# Altium PCB PCB_PID LINE FOLLOWER_2_2023-06-07.pcbdoc
Units mil, origin at the board's own origin, x right, y up, seen from the top; angles counter-clockwise.
Board outline 4910 x 2903.11 mil, 2 copper layers (Top Layer, Bottom Layer); 14 components, 41 nets, 75 pads, 4 vias.
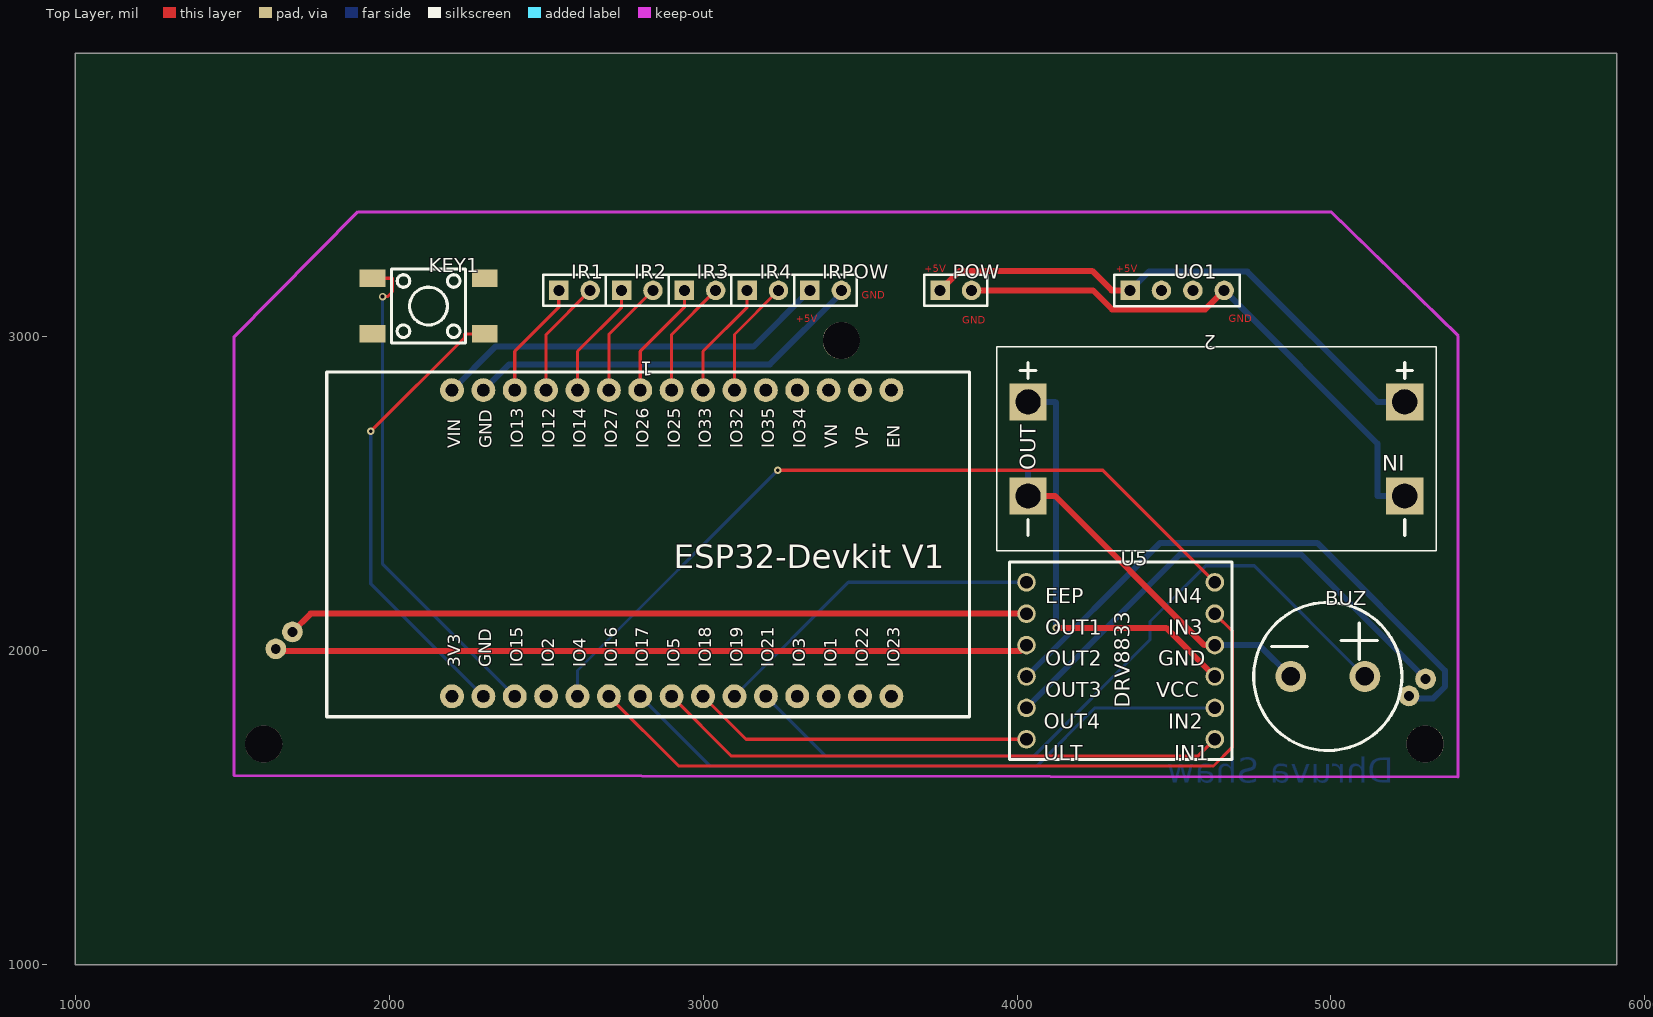
[diagram p0: Top Layer view]
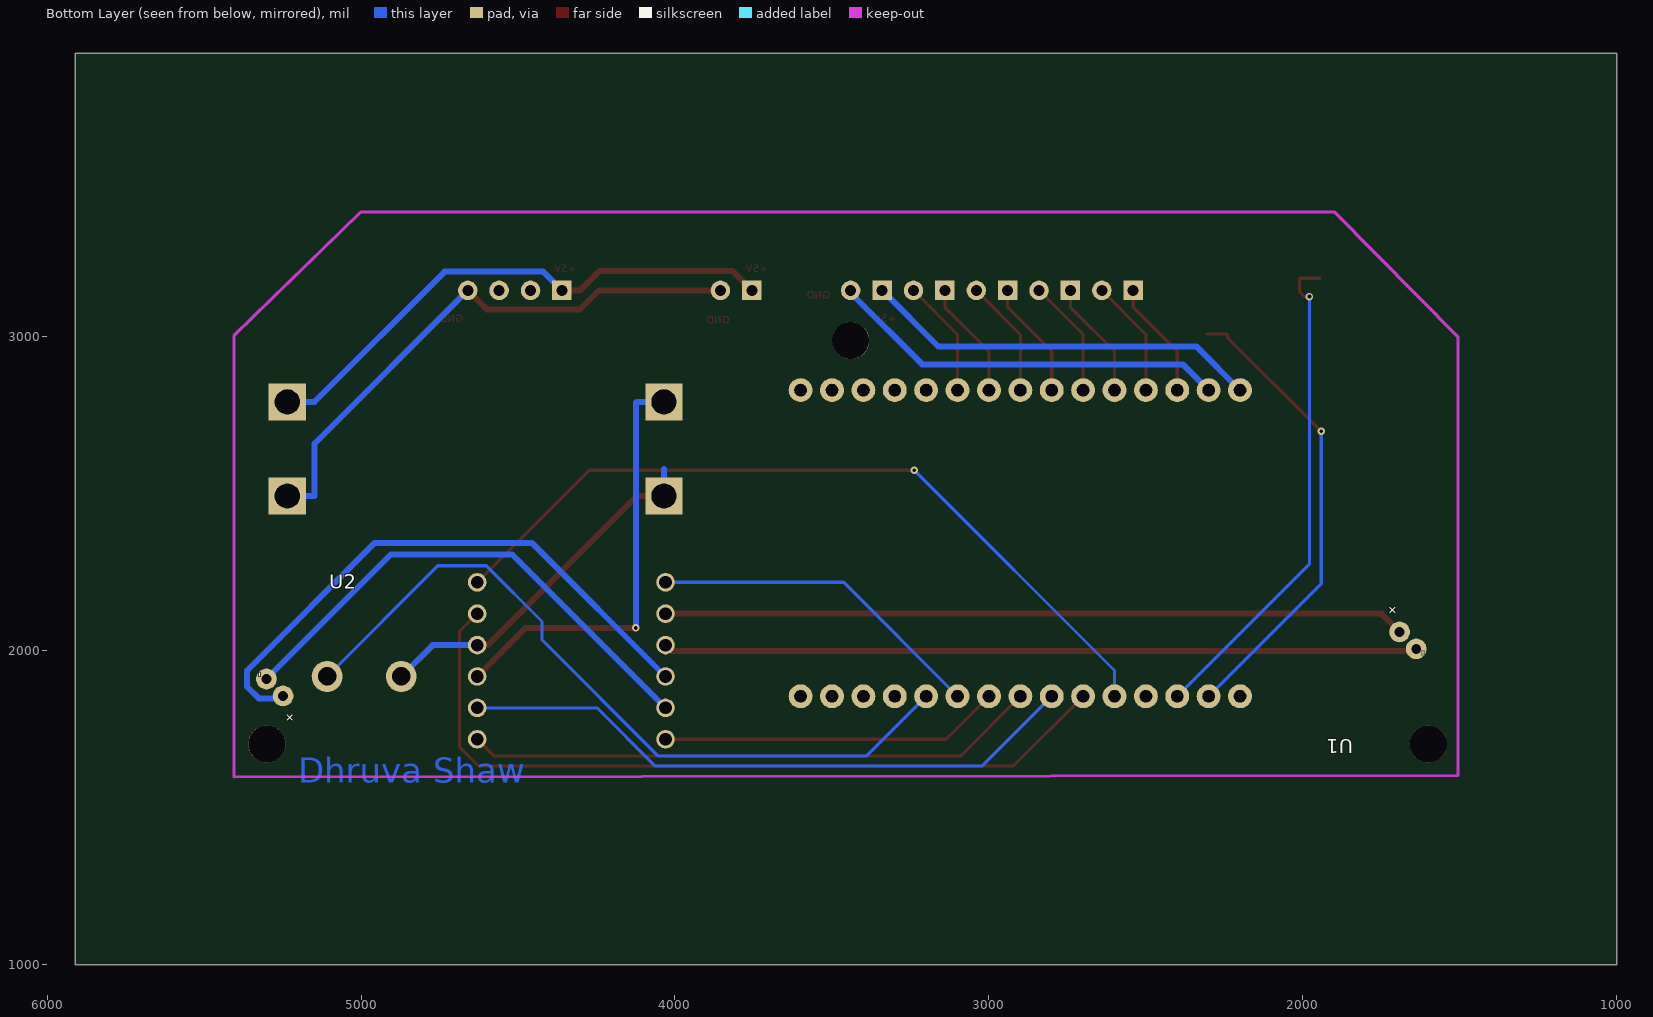
[diagram p1: Bottom Layer view, seen from below]

## Layer stack, top to bottom
Top Layer: signal copper (thickness not stored)
Dielectric: dielectric 12.6, FR-4, Dk 4.8
Bottom Layer: signal copper (thickness not stored)

## Board outline
5910,1000 1000,1000 1000,3903.11 5910,3903.11

## Components (designator, comment, footprint, x,y, rotation, side; value= is the part's Value field where it differs from the comment)
1 "ESP32DEVKITV1" ESP32-DEVKITV1 3100,2388.11 r0 top
2 "DC-DC-STEP-UP-MT3608" DC-DC-STEP-UP-MT3608 4635,2643.11 r0 top
BUZ "BUZZER" BUZ-TH_BD12.0-P6.00-D0.9-RD 4990,1918.11 r0 top
IR1 "IR SENSOR ARRAY" HDR-F-2.54_1X2 2590,3148.11 r0 top
IR2 "IR SENSOR ARRAY" HDR-F-2.54_1X2 2790,3148.11 r0 top
IR3 "HDR-F-2.54_1x2" HDR-F-2.54_1X2 2990,3148.11 r0 top
IR4 "IR SENSOR ARRAY" HDR-F-2.54_1X2 3190,3148.11 r0 top
IRPOW "IR SENSOR ARRAY POWER" HDR-F-2.54_1X2 3390,3148.11 r0 top
KEY1 "4PINTACTPCBTHTPUSHBUTTON" SW-SMD_4P-L6.0-W6.0-P4.50-LS10.0_TL3301EF160QG 2125,3098.11 r0 top
POW "POWER" HDR-F-2.54_1X2 3805,3148.11 r0 top
U1 "MOTOR" VIBE-MOTOR-10MM 1665,2033.11 r180 bottom
U2 "MOTOR" VIBE-MOTOR-10MM 5275,1883.11 r0 bottom
U5 "DRV8833 (NO ORIGINAL)" "DRV8833 (NO ORIGINAL)" 4330,1968.11 r0 top
UO1 "USB OUT" HDR-F-2.54_1X4 4510,3148.11 r0 top

## Footprints (in the part's own frame and the unit in brackets; to place one, negate y for a bottom-side part, rotate by r counter-clockwise, add the part's x,y. Pads: shape width x height; smd on the part's side, far side on the other; paste and mask are expansions set on the pad)
BUZ-TH_BD12.0-P6.00-D0.9-RD [mm]
  round 2.5 hole 1.5: 1(-3,0) 2(3,0)
  silkscreen extent -5.99,-5.99 5.99,5.99
DC-DC-STEP-UP-MT3608 [mm]
  rect 3x3 hole 2 slot 2.005 at 0 deg: IN+(15.24,3.81) IN-(15.24,-3.81) OUT+(-15.24,3.81) OUT-(-15.24,-3.81)
  silkscreen extent -17.78,-8.25 17.78,8.25
"DRV8833 (NO ORIGINAL)" [mm]
  round 1.5 hole 1.02: 1(-7.62,6.35) 2(-7.62,3.81) 3(-7.62,1.27) 4(-7.62,-1.27) 5(-7.62,-3.81) 6(-7.62,-6.35) 7(7.62,6.35) 8(7.62,3.81) 9(7.62,1.27) 10(7.62,-1.27) 11(7.62,-3.81) 12(7.62,-6.35)
  silkscreen extent -9,-8 9,8
ESP32-DEVKITV1 [mil]
  round 76 hole 39.36: 1(-900.39,-533.07) 2(-800.39,-533.07) 3(-700.39,-533.07) 4(-600.39,-533.07) 5(-500.39,-533.07) 6(-400.39,-533.07) 7(-300.39,-533.07) 8(-200.39,-533.07) 9(-100.39,-533.07) 10(-0.39,-533.07) 11(99.61,-533.07) 12(199.61,-533.07) 13(299.61,-533.07) 14(399.61,-533.07) 15(499.61,-533.07) 16(499.61,442.13) 17(399.61,442.13) 18(299.61,442.13) 19(199.61,442.13) 20(99.61,442.13) 21(-0.39,442.13) 22(-100.39,442.13) 23(-200.39,442.13) 24(-300.39,442.13) 25(-400.39,442.13) 26(-500.39,442.13) 27(-600.39,442.13) 28(-700.39,442.13) 29(-800.39,442.13) 30(-900.39,442.13)
  silkscreen extent -1299,-598 748,500
HDR-F-2.54_1X2 [mil]
  rect 62x62 hole 35: 1(-50,0)
  round 62 hole 35: 2(50,0)
  silkscreen extent -100,-49 100,50
HDR-F-2.54_1X4 [mil]
  rect 62x62 hole 35: 1(-150,0)
  round 62 hole 35: 2(-50,0) 3(50,0) 4(150,0)
  silkscreen extent -200,-50 200,50
SW-SMD_4P-L6.0-W6.0-P4.50-LS10.0_TL3301EF160QG [mm]
  rect 2.1x1.4 smd: 1(-4.55,2.25) 2(4.55,2.25) 3(-4.55,-2.25) 4(4.55,-2.25)
  silkscreen extent -3,-3 3,3
VIBE-MOTOR-10MM [mil]
  round 66 hole 31.4: +(-26.5,27) -(26.5,-27)

## Free pads (board coordinates)
  round 118.11 hole 118.11 unplated: ""(1600,1703.11) ""(3440,2988.11) ""(5300,1703.11)

## Via types
v1: diameter 24.02, hole 12.01, Top Layer to Bottom Layer, tented both sides, 4 vias

## Nets (pads, with @x,y where several pads share a name; then routed paths per layer and width w, separated by ;. In a path a pad name is that pad's centre, name@x,y a point inside that pad or via, vN(x,y) a via of type N, cw(c..) or ccw(c..) an arc to the next point about the centre after c; other vN are vias at no path point)
1_1: 1.1
1_2: 1.2 KEY1.4 | length 1491
  Top Layer w10: v1(1941.15,2699.12) 2239.83,2997.8 2239.83,3009.53 KEY1.4
  Bottom Layer w10: v1(1941.15,2699.12) 1941.15,2213.5 1.2
1_3: 1.3 KEY1.1 | length 1592.6
  Top Layer w10: KEY1.1 2010.18,3186.69 2010.18,3144.07 1994.44,3128.33 v1(1978.69,3128.33)
  Bottom Layer w10: v1(1978.69,3128.33) 1978.69,2275.96 1.3
1_4: 1.4
1_5: 1.5 U5.7 | length 2524.7
  Top Layer w10: v1(3237.66,2575.19) 4272.92,2575.19 U5.7
  Bottom Layer w10: 1.5 2599.61,1937.14 v1(3237.66,2575.19)
1_6: 1.6 U5.8 | length 2552.1
  Top Layer w10: 1.6 2921.62,1633.03 4625.78,1633.03 4686.85,1694.1 4686.85,2061.26 U5.8
1_7: 1.7 U5.11 | length 1999.5
  Bottom Layer w10: 1.7 3022.24,1632.41 4062.54,1632.41 4248.24,1818.11 U5.11
1_8: 1.8 U5.12 | length 1831.7
  Top Layer w10: 1.8 3090.38,1664.27 4576.16,1664.27 U5.12
1_9: 1.9 U5.6 | length 1087.1
  Top Layer w10: 1.9 3136.54,1718.11 U5.6
1_10: 1.10 U5.1 | length 1080.8
  Bottom Layer w10: 1.10 3462.68,2218.11 U5.1
1_11: 1.11 BUZ.2 | length 2418.2
  Bottom Layer w10: 1.11 3389.4,1665.25 4054.24,1665.25 4423.51,2034.52 4423.51,2093.05 4601.17,2270.71 4755.51,2270.71 BUZ.2
1_12: 1.12
1_13: 1.13
1_14: 1.14
1_15: 1.15
1_16: 1.16
1_17: 1.17
1_18: 1.18
1_19: 1.19
1_20: 1.20
1_21: 1.21 IR4.2 | length 376
  Top Layer w10: 1.21 3099.61,3007.72 IR4.2
1_22: 1.22 IR4.1 | length 376
  Top Layer w10: 1.22 2999.61,2953.75 3140,3094.14 IR4.1
1_23: 1.23 IR3.2 | length 376
  Top Layer w10: 1.23 2899.61,3007.72 IR3.2
1_24: 1.24 IR3.1 | length 376
  Top Layer w10: 1.24 2799.61,2953.75 2940,3094.14 IR3.1
1_25: 1.25 IR2.2 | length 376
  Top Layer w10: 1.25 2699.61,3007.72 IR2.2
1_26: 1.26 IR2.1 | length 376
  Top Layer w10: 1.26 2599.61,2953.75 2740,3094.14 IR2.1
1_27: 1.27 IR1.2 | length 376
  Top Layer w10: 1.27 2499.61,3007.72 IR1.2
1_28: 1.28 IR1.1 | length 376
  Top Layer w10: 1.28 2399.61,2953.75 2540,3094.14 IR1.1
1_30: 1.30 IRPOW.1 | length 1272.1
  Bottom Layer w19.05: 1.30 2337.96,2968.59 3160.48,2968.59 IRPOW.1
GND: 1.29 2.OUT- BUZ.1 IRPOW.2 U5.9 | length 2438.5
  Top Layer w19.05: 2.OUT- 4121.56,2493.11 4596.56,2018.11 U5.9
  Bottom Layer w19.05: 1.29 2381.62,2912.25 3212.4,2912.25 3440,3139.85 IRPOW.2 ; 2.OUT- 4035,2579.67 ; U5.9 4771.89,2018.11 BUZ.1
KEY1_2: KEY1.2
KEY1_3: KEY1.3
POW_1: 2.IN+ POW.1 UO1.1 | length 1728.1
  Top Layer w19.05: POW.1 3817.31,3210.42 4239.19,3210.42 4301.5,3148.11 UO1.1
  Bottom Layer w19.05: UO1.1 4419.7,3207.81 4733.75,3207.81 5148.45,2793.11 2.IN+
POW_2: 2.IN- POW.2 UO1.4 | length 1799
  Top Layer w19.05: POW.2 4241.83,3148.11 4302.31,3087.63 4599.52,3087.63 UO1.4
  Bottom Layer w19.05: UO1.4 5148.45,2659.66 5148.45,2493.11 2.IN-
U1_+: U1.+ U5.2 | length 2362.5
  Top Layer w19.05: U1.+ 1749.5,2118.11 U5.2
U1_-: U1.- U5.3 | length 2402.1
  Top Layer w19.05: U1.- 1645.27,1999.34 4011.23,1999.34 U5.3
U2_+: U2.+ U5.4 | length 1863
  Bottom Layer w19.05: U5.4 4455.87,2343.98 4955.74,2343.98 5363.32,1936.4 5363.32,1885.62 5325.86,1848.16 5256.45,1848.16 U2.+
U2_-: U2.- U5.5 | length 1638.1
  Bottom Layer w19.05: U5.5 4518.53,2306.64 4904.97,2306.64 U2.-
U5_10: 2.OUT+ U5.10 | length 1377.6
  Top Layer w19.05: v1(4124.49,2072.9) 4475.21,2072.9 U5.10
  Bottom Layer w19.05: 2.OUT+ 4121.56,2793.11 4124.49,2790.18 v1(4124.49,2072.9)
UO1_2: UO1.2
UO1_3: UO1.3

## Other copper
Top Layer:
  text "+5V" at 3705,3206.3 h23.62
  text "+5V" at 4315,3206.3 h23.62
  text "GND" at 3505,3121.3 h23.62
  text "+5V" at 3295,3046.3 h23.62
  text "GND" at 4675,3046.3 h23.62
  text "GND" at 3825,3041.3 h23.62
Bottom Layer:
  text "Dhruva Shaw" at 5200,1578.74 h78.74

## Text inside footprints (layer, text, board x,y; h text height)
1: Top Overlay "3V3" at 2225.59,1947.17 h40 r90; Top Overlay "GND" at 2325.59,1947.17 h40 r90; Top Overlay "IO15" at 2425.59,1947.17 h40 r90; Top Overlay "IO2" at 2525.59,1947.17 h40 r90; Top Overlay "IO4" at 2625.59,1947.17 h40 r90; Top Overlay "IO16" at 2725.59,1947.17 h40 r90; Top Overlay "IO17" at 2825.59,1947.17 h40 r90; Top Overlay "IO5" at 2925.59,1947.17 h40 r90; Top Overlay "IO18" at 3025.59,1947.17 h40 r90; Top Overlay "IO19" at 3125.59,1947.17 h40 r90; Top Overlay "IO21" at 3225.59,1947.17 h40 r90; Top Overlay "IO3" at 3325.59,1947.17 h40 r90; Top Overlay "IO1" at 3425.59,1947.17 h40 r90; Top Overlay "IO22" at 3525.59,1947.17 h40 r90; Top Overlay "IO23" at 3625.59,1947.17 h40 r90; Top Overlay "VIN" at 2226.38,2644.8 h40 r90; Top Overlay "GND" at 2326.38,2644.8 h40 r90; Top Overlay "IO13" at 2426.38,2644.8 h40 r90; Top Overlay "IO12" at 2526.38,2644.8 h40 r90; Top Overlay "IO14" at 2626.38,2644.8 h40 r90; Top Overlay "IO27" at 2726.38,2644.8 h40 r90; Top Overlay "IO26" at 2826.38,2644.8 h40 r90; Top Overlay "IO25" at 2926.38,2644.8 h40 r90; Top Overlay "IO33" at 3026.38,2644.8 h40 r90; Top Overlay "IO32" at 3126.38,2644.8 h40 r90; Top Overlay "IO35" at 3226.38,2644.8 h40 r90; Top Overlay "IO34" at 3326.38,2644.8 h40 r90; Top Overlay "VN" at 3426.38,2644.8 h40 r90; Top Overlay "VP" at 3526.38,2644.8 h40 r90; Top Overlay "EN" at 3626.38,2644.8 h40 r90; Top Overlay "ESP32-Devkit V1" at 2905.91,2262.91 h76; Document "ESP32-DEVKITV1" at 3296.85,1709.37 h50
2: Top Overlay "IN" at 5235,2623.11 h50 r180; Top Overlay "OUT" at 4060,2575.61 h50 r90
U1: Bottom Overlay "-" at 1605.5,1985.11 h30 r270; Bottom Overlay "+" at 1692.89,2125.72 h30 r225
U2: Bottom Overlay "-" at 5334.5,1931.11 h30 r90; Bottom Overlay "+" at 5247.11,1790.5 h30 r45
U5: Top Overlay "IN1" at 4501.42,1651.69 h47.24; Top Overlay "IN2" at 4482.12,1751.69 h47.24; Top Overlay "VCC" at 4443.42,1851.69 h47.24; Top Overlay "GND" at 4449.92,1951.69 h47.24; Top Overlay "IN3" at 4482.12,2051.69 h47.24; Top Overlay "IN4" at 4480.02,2151.69 h47.24; Top Overlay "ULT" at 4085.02,1651.69 h47.24; Top Overlay "OUT4" at 4085.02,1751.69 h47.24; Top Overlay "OUT3" at 4090.02,1851.69 h47.24; Top Overlay "OUT2" at 4090.02,1951.69 h47.24; Top Overlay "OUT1" at 4090.02,2051.69 h47.24; Top Overlay "EEP" at 4090.02,2151.69 h47.24; Top Overlay "DRV8833" at 4359.36,1818.37 h47.24 r90